# EAGLE board V2d (EAGLE 6.5.0)
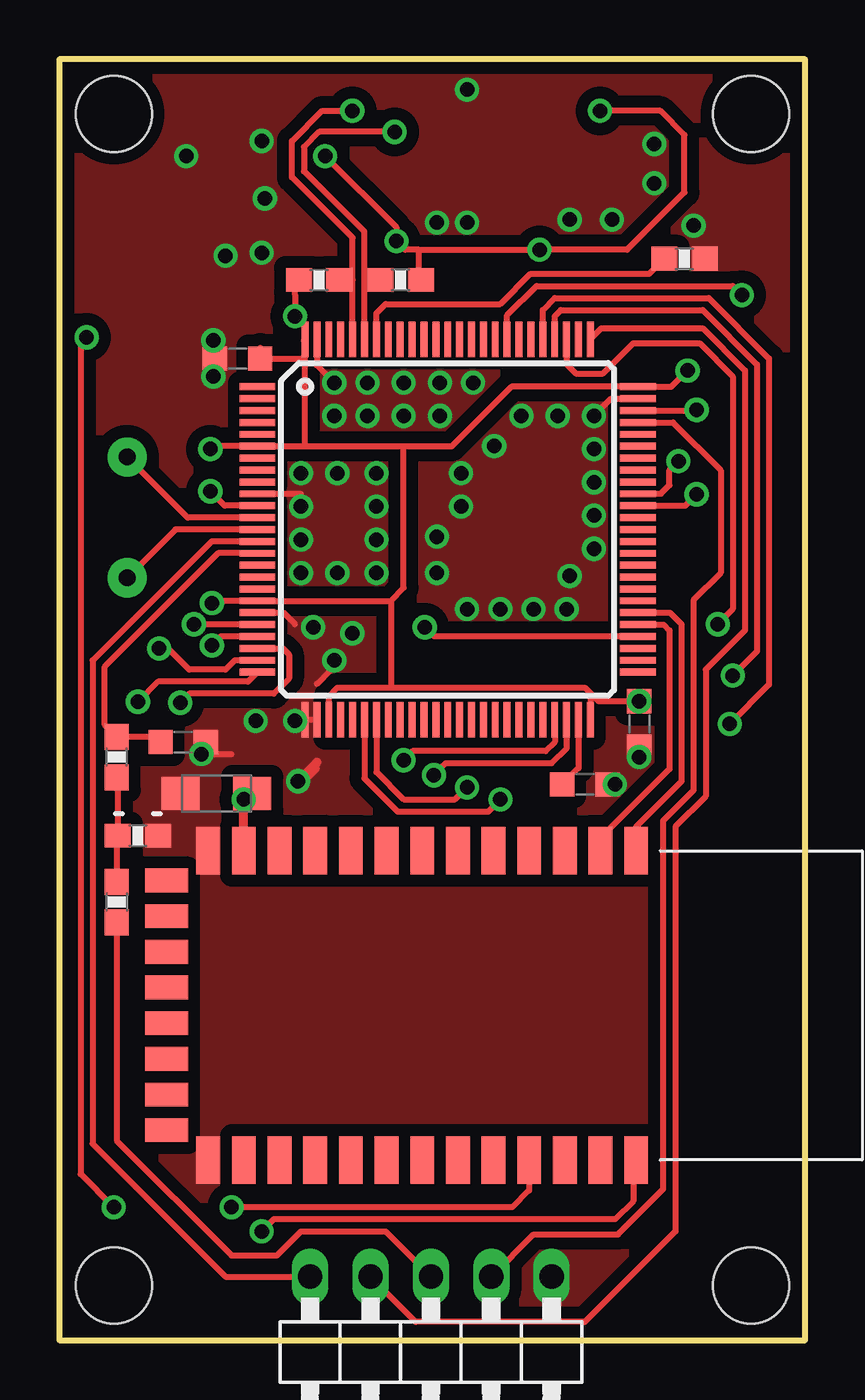
[diagram p0: board, top side]
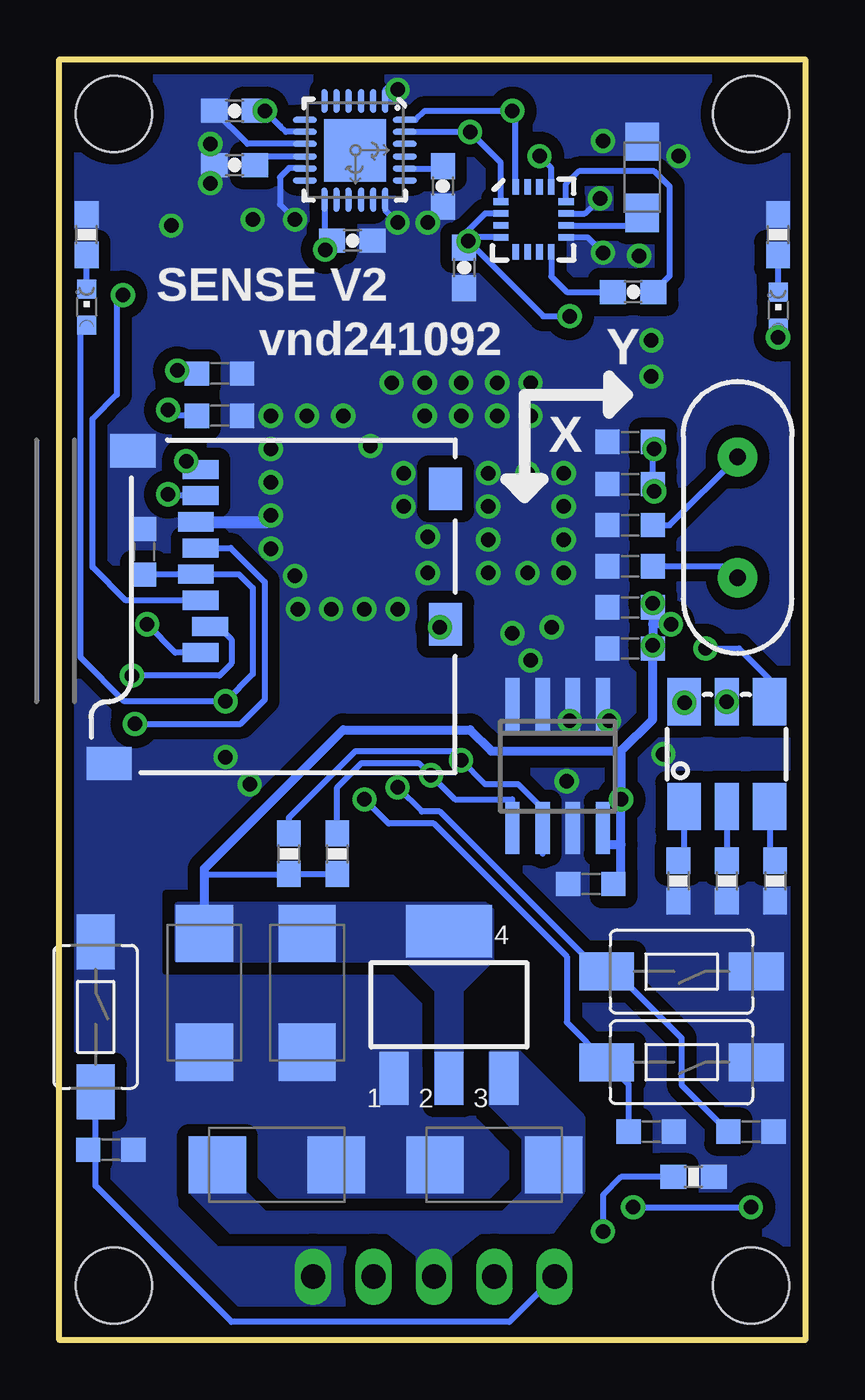
[diagram p1: board, bottom side, seen from below]

Size 31.37 x 53.85 mm. Coordinates in mm from the lower left corner, seen from the top.
Outline: 0,0 31.37,0 31.37,53.85 0,53.85 0,0
Copper layers (1*16): Top 0.035mm / dielectric 1.5mm / Bottom 0.035mm
Design rules "default *": minimum track width 10mil, minimum drill 24mil, track to track 8mil, track to pad 8mil, pad to pad 8mil, via to via 10mil, smd to smd 8mil, copper to edge 20mil, drill to drill 10mil, minimum pad ring 10mil, minimum via ring 8mil, stop-mask expansion 0mil, vias tented up to drill 100mil, thermal gap 10mil
Net classes: 1 power: width 0.15 mm, drill 0.2 mm, clearance 0.152 mm
Holes 3.2 mm at 2.29,2.29 29.08,2.29 29.08,51.56 2.29,51.56
tKeepout: area 120.2,-2.6 to 127.2,4.4; area 15.2,-6.4 to 22.2,0.6; area 93.4,-2.6 to 100.4,4.4; area 93.4,46.5 to 100.4,53.5; area 120.2,46.5 to 127.2,53.5

## Footprints (pad centres in the part's own frame; a part is rotated, then mirrored left to right if it is on the bottom)
C-0603 = smd 1.016 x 1.016: 1 -0.953,0; 2 0.953,0
SMC_C = smd 2.4 x 2.4: + -2.5,0; - 2.5,0
SMC_A = smd 1.6 x 1.4: + -1.5,0; - 1.5,0
SPARKFUN_0603-CAP = smd 1.1 x 1: 1 -0.85,0; 2 0.85,0
SO-08 = smd 0.6 x 2.2: 1 -1.905,-2.6; 2 -0.635,-2.6; 3 0.635,-2.6; 4 1.905,-2.6; 5 1.905,2.6; 6 0.635,2.6; 7 -0.635,2.6; 8 -1.905,2.6
LINEAR_SOT223 = smd 1.219 x 2.235: 1 -2.311,-3.099; 2 0,-3.099; 3 2.311,-3.099 | smd 3.6 x 2.2: 4 0,3.099
TESTING_QFN-24-4MM2 = smd 1.016 x 0.254: 1 -2.066,1.257; 2 -2.066,0.75; 3 -2.066,0.247; 4 -2.066,-0.287; 5 -2.066,-0.792; 6 -2.066,-1.297; 13 2.086,-1.297; 14 2.086,-0.792; 15 2.086,-0.287; 16 2.086,0.247; 17 2.086,0.75; 18 2.086,1.257 | smd 0.254 x 1.016: 7 -1.267,-2.122; 8 -0.762,-2.122; 9 -0.258,-2.122; 10 0.278,-2.122; 11 0.78,-2.122; 12 1.287,-2.122; 19 1.287,2.082; 20 0.78,2.082; 21 0.278,2.082; 22 -0.258,2.082; 23 -0.762,2.082; 24 -1.267,2.082 | smd 2.616 x 2.616: P$1 0.02,-0.01
SPARKFUN_16LPCC = smd 0.65 x 0.28: 1 -1.37,0.75; 2 -1.37,0.25; 3 -1.37,-0.25; 4 -1.37,-0.75; 9 1.37,-0.75; 10 1.37,-0.25; 11 1.37,0.25; 12 1.37,0.75 | smd 0.28 x 0.65: 5 -0.75,-1.37; 6 -0.25,-1.37; 7 0.25,-1.37; 8 0.75,-1.37; 13 0.75,1.37; 14 0.25,1.37; 15 -0.25,1.37; 16 -0.75,1.37
1X05/90 = drill 1.016 long: 1 -5.08,-3.81; 2 -2.54,-3.81; 3 0,-3.81; 4 2.54,-3.81; 5 5.08,-3.81
CHIPLED_0603 = smd 0.8 x 0.8: A 0,-0.75; C 0,0.75
SPARKFUN_0603-RES = smd 1.1 x 1: 1 -0.85,0; 2 0.85,0
TACTILE-SWITCH-1101NE = smd 2.3 x 1.6: P$1 -3.15,0; P$2 3.15,0
MICRO-SD-SOCKET-PP = smd 0.8 x 1.5: 1 -8.94,10.7; 2 -7.84,10.3; 3 -6.74,10.7; 4 -5.64,10.9; 5 -4.54,10.7; 6 -3.44,10.9; 7 -2.34,10.7; 8 -1.24,10.7 | smd 1.8 x 1.4: CD1 -2.05,0.4; CD2 -7.75,0.4 | smd 1.4 x 1.9: GND1 -13.6,14.55; GND3 -0.45,13.55
TQFP100 = smd 1.5 x 0.29: 1 -8,6; 2 -8,5.5; 3 -8,5; 4 -8,4.5; 5 -8,4; 6 -8,3.5; 7 -8,3; 8 -8,2.5; 9 -8,2; 10 -8,1.5; 11 -8,1; 12 -8,0.5; 13 -8,0; 14 -8,-0.5; 15 -8,-1; 16 -8,-1.5; 17 -8,-2; 18 -8,-2.5; 19 -8,-3; 20 -8,-3.5; 21 -8,-4; 22 -8,-4.5; 23 -8,-5; 24 -8,-5.5; 25 -8,-6; 51 8,-6; 52 8,-5.5; 53 8,-5; 54 8,-4.5; 55 8,-4; 56 8,-3.5; 57 8,-3; 58 8,-2.5; 59 8,-2; 60 8,-1.5; 61 8,-1; 62 8,-0.5; 63 8,0; 64 8,0.5; 65 8,1; 66 8,1.5; 67 8,2; 68 8,2.5; 69 8,3; 70 8,3.5; 71 8,4; 72 8,4.5; 73 8,5; 74 8,5.5; 75 8,6 | smd 0.29 x 1.5: 26 -6,-8; 27 -5.5,-8; 28 -5,-8; 29 -4.5,-8; 30 -4,-8; 31 -3.5,-8; 32 -3,-8; 33 -2.5,-8; 34 -2,-8; 35 -1.5,-8; 36 -1,-8; 37 -0.5,-8; 38 0,-8; 39 0.5,-8; 40 1,-8; 41 1.5,-8; 42 2,-8; 43 2.5,-8; 44 3,-8; 45 3.5,-8; 46 4,-8; 47 4.5,-8; 48 5,-8; 49 5.5,-8; 50 6,-8; 76 6,8; 77 5.5,8; 78 5,8; 79 4.5,8; 80 4,8; 81 3.5,8; 82 3,8; 83 2.5,8; 84 2,8; 85 1.5,8; 86 1,8; 87 0.5,8; 88 0,8; 89 -0.5,8; 90 -1,8; 91 -1.5,8; 92 -2,8; 93 -2.5,8; 94 -3,8; 95 -3.5,8; 96 -4,8; 97 -4.5,8; 98 -5,8; 99 -5.5,8; 100 -6,8
BLUETOOTH_SMD = smd 2 x 1: 1 0,0; 2 0,-1.5; 3 0,-3; 4 0,-4.5; 5 0,-6; 6 0,-7.5; 7 0,-9; 8 0,-10.5; 9 0,-12; 10 0,-13.5; 11 0,-15; 12 0,-16.5; 13 0,-18; 22 13,-18; 23 13,-16.5; 24 13,-15; 25 13,-13.5; 26 13,-12; 27 13,-10.5; 28 13,-9; 29 13,-7.5; 30 13,-6; 31 13,-4.5; 32 13,-3; 33 13,-1.5; 34 13,0 | smd 1 x 1.8: 14 1.25,-19.75; 15 2.75,-19.75; 16 4.25,-19.75; 17 5.75,-19.75; 18 7.25,-19.75; 19 8.75,-19.75; 20 10.25,-19.75; 21 11.75,-19.75
SMD = smd 1.99 x 1.4: B+ -2.2,-1.8; B- 2.2,-1.8; R+ -2.2,1.8; R- 2.2,1.8 | smd 1.99 x 1: G+ -2.2,0; G- 2.2,0
HC49US = drill 0.7 pad 1.651: 1 -2.54,0; 2 2.54,0

## Placement (x,y rotation side)
C1  [C-0603]  7.37,34.26 180 bottom
C2  [C-0603]  27.81,33.15 270 bottom
C3  6v 10u  [SMC_C]  20.96,14.61 270 bottom
C4  6v 10u  [SMC_A]  6.6,22.99 180 top
C5  16v47u  [SMC_C]  13.08,7.37 180 bottom
C6  [C-0603]  7.37,29.08 180 bottom
C7  [C-0603]  6.48,8.76 0 bottom
C8  [C-0603]  7.37,30.81 180 bottom
C9  [C-0603]  7.37,35.99 180 bottom
C10  [C-0603]  7.37,37.77 180 bottom
C11  [C-0603]  9.02,19.18 0 bottom
C12  [C-0603]  7.49,41.27 180 top
C13  [C-0603]  29.21,8 0 bottom
C15  [C-0603]  22.1,23.37 0 top
C16  16v47u  [SMC_C]  22.23,7.37 0 bottom
C17  [C-0603]  24.64,38.86 0 bottom
C18  [C-0603]  24.38,25.91 270 top
C19  [C-0603]  24.64,40.64 0 bottom
C20  [C-0603]  7.37,32.54 180 bottom
C21  [C-0603]  5.21,25.15 180 top
C23  6v 10u  [SMC_C]  25.27,14.61 270 bottom
C25  [C-0603]  2.29,8.76 0 bottom
C26  100n  [SPARKFUN_0603-CAP]  24,49.4 180 bottom
C27  100n  [SPARKFUN_0603-CAP]  7.24,44.07 0 bottom
C28  4.7u  [SMC_A]  6.86,48.9 90 bottom
C29  100n  [SPARKFUN_0603-CAP]  14.35,45.09 270 bottom
C36  2.2n  [SPARKFUN_0603-CAP]  15.24,48.51 270 bottom
C38  100n  [SPARKFUN_0603-CAP]  19.05,46.23 0 bottom
C39  100n  [SPARKFUN_0603-CAP]  24,51.69 180 bottom
IC2  24LC256SN  [SO-08]  10.41,24.13 180 bottom
IC3  LINEAR_MC33269ST-3.3T3  [LINEAR_SOT223]  14.99,14.1 0 bottom
IC4  MPU-6050  [TESTING_QFN-24-4MM2]  18.92,50.04 270 bottom
IC5  HMC5883L  [SPARKFUN_16LPCC]  11.43,47.12 0 bottom
JP4  [1X05/90]  15.62,-1.14 180 top
LD1  [CHIPLED_0603]  1.14,43.31 0 bottom
LD2  [CHIPLED_0603]  30.23,43.43 0 bottom
R1  10K  [SPARKFUN_0603-RES]  30.23,46.48 90 bottom
R2  10K  [SPARKFUN_0603-RES]  1.27,19.3 270 bottom
R3  10K  [SPARKFUN_0603-RES]  3.3,19.3 270 bottom
R5  10K  [SPARKFUN_0603-RES]  4.7,6.86 0 bottom
R6  10K  [SPARKFUN_0603-RES]  5.33,19.3 270 bottom
R7  10k  [SPARKFUN_0603-RES]  26.29,45.47 180 top
R9  10K  [SPARKFUN_0603-RES]  1.14,46.48 90 bottom
R10  [SPARKFUN_0603-RES]  14.35,44.58 0 top
R11  [SPARKFUN_0603-RES]  10.92,44.58 180 top
R15  4K7  [SPARKFUN_0603-RES]  21.72,20.45 90 bottom
R16  4K7  [SPARKFUN_0603-RES]  19.69,20.45 270 bottom
R23  10K  [SPARKFUN_0603-RES]  2.41,24.51 90 top
R24  10K  [SPARKFUN_0603-RES]  2.41,18.41 270 top
R25  10K  [SPARKFUN_0603-RES]  3.3,21.21 180 top
S1  RESET  [TACTILE-SWITCH-1101NE]  29.85,13.59 270 bottom
S2  RESET  [TACTILE-SWITCH-1101NE]  5.21,15.49 180 bottom
S4  RESET  [TACTILE-SWITCH-1101NE]  5.21,11.68 180 bottom
SDCARD2  microSD Socket  [MICRO-SD-SOCKET-PP]  14.73,37.85 90 bottom
STM  STM32F4X7VX  [TQFP100]  16.33,34.08 0 top
U1  HC_05  [BLUETOOTH_SMD]  24.26,20.57 270 top
U$12  RGB_LED  [SMD]  3.3,24.64 90 bottom
Y1  [HC49US]  2.85,34.59 90 bottom

## Library data of the parts
C1 C2 C6-C13 C15 C17-C21 C25 = cap-pan40
C3-C5 C16 C23 C28 = rcl
C26 C27 C29 C36 C38 C39 R10 R11 = Helios_RLC
IC2 = microchip; DIGIKEY: 24LC256-E/SN-ND; MF: MICROCHIP; MPN: 24LC256-I/SN; OC_FARNELL: 9757996; OC_NEWARK: 27C9144
IC3 = Robotech_Other
IC4 IC5 = Helios_IMU
JP4 = pinhead-1
LD1 LD2 = led
R1-R3 R5-R7 R9 R15 R16 R23-R25 = Robotech_RCL
S1 S2 S4 = pixhawk2; PARTNO: EVQ-P7J01P
SDCARD2 = SparkFun
STM = pixhawk2; PARTNO: STM32F427VI
U1 = SerialPortBluetooth
U$12 = RGB_LED
Y1 = SparkFun-FreqCtrl

## Nets
3.3V: C2.2 C3.+ C4.+ C6.1 C8.1 C9.1 C10.1 C11.2 C12.1 C18.1 C19.1 C23.+ C29.1 C38.1 C39.1 IC2.8 IC3.2 IC3.4 IC4.8 IC4.13 IC5.2 IC5.4 IC5.13 LD2.A R10.2 R11.2 R15.1 R16.2 SDCARD2.4 STM.6 STM.11 STM.19 STM.21 STM.22 STM.28 STM.50 STM.75 STM.100 U1.12
+5V: C5.+ C16.+ IC3.3 JP4.3 R24.2
ADC12_IN1: C21.2 R23.2 STM.15
ADC12_IN8: STM.35
BOOT0: R7.2 STM.94
BOOT1: STM.37
BT_KEY: R5.1 U1.34
BUTTONA: C7.1 S4.P$2 STM.31
BUTTONB: C25.1 S2.P$2 STM.32
GND: C1.2 C2.1 C3.- C4.- C5.- C6.2 C7.2 C8.2 C9.2 C10.2 C11.1 C12.2 C13.2 C15.2 C16.- C17.2 C18.2 C19.2 C20.2 C21.1 C23.- C25.2 C26.2 C28.- C29.2 C36.2 C38.2 C39.2 IC2.1 IC2.2 IC2.3 IC2.4 IC2.7 IC3.1 IC4.1 IC4.9 IC4.11 IC4.18 IC5.9 IC5.11 JP4.1 R1.2 R2.2 R3.2 R5.2 R6.2 R7.1 R9.2 R25.1 S1.P$1 S2.P$1 S4.P$1 SDCARD2.6 SDCARD2.GND1 SDCARD2.GND3 STM.10 STM.20 STM.26 STM.27 STM.74 STM.99 U1.13 U1.22
I2C1_SCL: IC4.23 IC5.1 R10.1 STM.95
I2C1_SDA: IC4.24 IC5.16 R11.1 STM.96
I2C2_SCL: IC2.6 R15.2 STM.47
I2C2_SDA: IC2.5 R16.1 STM.48
JTDI: STM.77
N$1: C1.1 STM.12 Y1.2
N$2: R2.1 U$12.B+
N$3: C26.1 IC4.10
N$4: LD1.A U1.31
N$5: LD1.C R9.1
N$6: R6.1 U$12.R+
N$7: R3.1 U$12.G+
N$8: C36.1 IC4.20
N$10: C27.1 IC5.8
N$11: LD2.C R1.1
N$12: C28.+ IC5.10
N$13: C27.2 IC5.12
N$27: R23.1 R24.1 R25.2
N$29: C20.1 STM.13 Y1.1
N$31: C17.1 STM.73
N$32: C15.1 STM.49
PWM_8: STM.63
PWM_9: STM.5
PWM_10: STM.64
PWM_11: STM.4
RGB_CH1: STM.23 U$12.R-
RGB_CH2: STM.24 U$12.B-
RGB_CH3: STM.25 U$12.G-
SDIO_CLK: SDCARD2.5 STM.80
SDIO_CMD: SDCARD2.3 STM.83
SDIO_D0: SDCARD2.7 STM.65
SDIO_D1: SDCARD2.8 STM.66
SDIO_D2: SDCARD2.1 STM.78
SDIO_D3: SDCARD2.2 STM.79
SDIO_DETECT: SDCARD2.CD2 STM.54
SW-!RESET: C13.1 JP4.5 S1.P$2 STM.14
SW_CLK: JP4.4 STM.76
SW_DIO: JP4.2 STM.72
USART1_RX: STM.93
USART1_TX: STM.92
USART3_RX: STM.56 U1.1
USART3_TX: STM.55 U1.2

## Tracks (layer width: path | path; a pad name or v marks a point on that pad's centre or on a via)
3.3V  (via drill 0.61)
  Top 0.254: STM.100 10.28,42.04 | 10.33,37.58 10.33,41.4 | 10.33,41.4 STM.100 | 10.33,37.58 STM.6 6.47,37.58 v6.35,37.47 | 10.33,41.4 10.2,41.27 C12.1 8.44,41.72 | 8.31,30.1 STM.21 5.67,30.08 v5.65,30.1 | 10.2,44.45 9.78,44.45 9.91,44.32 9.91,43.97 | 15.11,45.85 15.11,44.66 R10.2 15.24,44.62 | STM.28 11.33,27.08 11.68,27.43 13.94,27.43 | 13.94,27.43 22.1,27.43 22.33,27.2 | 22.33,27.2 STM.50 | R11.2 10.2,44.45 | 10.2,44.45 10.33,44.45 | 9.91,43.97 | 9.91,43.97 | STM.11 6.95,35.08 v6.35,35.69 | 10.33,37.58 14.48,37.58 | 14.48,37.58 16.5,37.58 19,40.08 STM.75 25.73,40.08 v26.42,40.77 | C18.1 22.67,26.86 22.33,27.2 | 15.11,45.85 v20.19,45.85 23.88,45.85 26.29,48.26 26.29,50.67 25.27,51.69 v22.73,51.69 | 14.46,45.92 v14.17,46.21 | 9.91,43.97 v9.91,43.05 10.33,42.63 STM.100 | STM.22 6.79,29.58 v6.41,29.21 | v6.41,30.99 6.51,31.08 STM.19 13.94,31.08 | v11.18,49.78 14.17,46.79 v14.17,46.21 | 15.11,45.85 14.54,45.85 v14.17,46.21 | 14.48,37.58 14.48,31.62 13.94,31.08 | 13.94,31.08 13.94,27.43 | C4.+ 8,22.99 v7.75,22.73
  Top 0.381: U1.12 v7.75,22.73
  Bottom 0.254: IC5.13 10.68,49.29 v11.18,49.78 | C39.1 v22.73,51.69 22.09,51.04 | IC4.8 21.84,50.8 22.09,51.04 | 22.09,51.04 | IC5.2 13.47,47.37 14.35,46.48 C29.1 14.35,46.03 v14.17,46.21 | v20.19,45.85 20.19,45.97 | 22.09,51.04 | 22.09,51.04 | v6.35,35.69 6.35,35.93 C9.1 6.41,37.4 v6.35,37.47 6.35,37.71 C10.1 | v6.41,30.99 C8.1 | C2.2 27.8,32.21 SDCARD2.4 23.82,32.21 23.24,31.62 23.24,28 C18.1 28.64,26.86 30.48,28.7 30.48,42.43 LD2.A | R16.2 R15.1 21.76,19.56 25.27,19.56 | IC4.13 20.22,45.87 v20.19,45.85 | C38.1 19.9,46.14 v20.19,45.85 | v14.17,46.21 11.01,43.05 v9.91,43.05 | IC5.4 14.02,46.37 v14.17,46.21 | C19.1 26.29,40.64 v26.42,40.77
  Bottom 0.381: 7.75,24.77 13.21,24.77 14.1,25.65 19.43,25.65 25.27,19.81 25.27,19.56 C23.+ | 7.75,24.77 v7.75,22.73 7.75,20.83 | C11.2 7.75,19.18 7.75,20.83 | 7.75,20.83 8.51,20.83 IC2.8 | C8.1 6.41,30.1 | v5.65,30.1 6.41,30.1 | 6.41,30.1 v6.41,29.21 C6.1 6.41,26.1 7.75,24.77
  other vias: 24.38,26.86
  pour Bottom (isolate 0.635, no thermals): 26.42,16 16.76,16 15.49,14.73 15.49,12.06 14.48,12.06 14.48,14.73 13.21,16 13.21,18.29 26.42,18.29
+5V
  Top 0.254: R24.2 2.41,8.38 7.24,3.56 9.14,3.56 10.16,4.57 13.72,4.57 JP4.3
  pour Bottom (isolate 0.635, no thermals): 16.26,2.67 16.26,3.56 17.53,4.57 24.13,4.57 25.78,6.22 23.62,6.22 22.73,5.33 12.7,5.33 11.81,6.22 11.81,8.51 13.21,9.91 13.21,12.06 12.06,12.06 9.4,9.4 9.4,6.22 10.67,4.57 13.72,4.57 14.99,3.56 14.99,2.67
ADC12_IN1
  Top 0.254: C21.2 arc90 4.04,25.36 R23.2 1.91,25.87 1.91,28.32 6.67,33.08 STM.15
BOOT0
  Top 0.254: STM.94 13.33,43.17 13.72,43.56 18.54,43.56 19.81,44.83 24.8,44.83 R7.2
BT_KEY  (via drill 0.61)
  Top 0.254: U1.34 24.13,7.45 24.13,5.84 23.37,5.08 9.02,5.08 v8.51,4.57
  Bottom 0.254: R5.1 7.75,6.86 8.51,6.1 v8.51,4.57
BUTTONA  (via drill 0.61)
  Top 0.254: STM.31 12.83,23.62 14.22,22.23 18.03,22.23 v18.54,22.73
  Bottom 0.254: v18.54,22.73 17.53,21.72 15.62,21.72 10.03,16.13 10.03,13.36 S4.P$2 | 8.76,11.68 S4.P$2 | S4.P$2 7.43,10.76 C7.1
BUTTONB  (via drill 0.61)
  Top 0.254: STM.32 13.33,23.88 14.48,22.73 16.64,22.73 v17.14,23.24
  Bottom 0.254: v17.14,23.24 16.13,22.23 15.37,22.23 8.64,15.49 S2.P$2 8,15.49 5.21,12.7 5.21,10.73 C25.1
GND  (via drill 0.61)
  Top 0.254: 10.83,27.59 11.43,28.19 11.43,28.45 v11.56,28.57 | v5.97,24.64 7.24,24.64 | 10.83,24.04 10.29,23.5 | v22.48,38.86 23.2,39.58 STM.74 | STM.10 10.16,35.58 | STM.26 STM.27 | STM.20 9.42,30.58 9.91,30.1 | STM.99 10.83,40.99 v11.56,40.26
  Top 0.381: 10.83,24.29 v10.03,23.5
  Bottom 0.254: 24.77,51.6 C39.2 23.46,50.3 IC4.9 | 17.24,52.1 IC4.1 17.67,52.56 17.27,52.96 | IC4.11 21.06,49.26 21.08,49.28 21.72,49.28 22.1,48.9 22.1,47.75 v21.46,47.12 | IC5.11 9.27,47.37 v8.64,48.01 | IC4.18 17.67,47.51 v17.14,46.99 | IC5.9 9.16,46.37 v8.51,45.72
  Bottom 0.508: SDCARD2.6 22.62,34.41
  other vias: 10.16,36.45 10.67,29.97 14.48,38.86 11.56,38.86 12.95,38.86 14.48,40.26 12.95,40.26 6.48,42.04 8.51,50.42 25.02,50.29 20.96,38.86 19.43,38.86 5.33,49.78 17.14,52.58 25.02,48.64 11.68,36.45 17.4,40.26 22.48,37.47 22.48,34.67 22.48,36.07 21.34,30.73 19.94,30.73 15.87,32.26 15.87,33.78 6.48,40.51 6.99,45.59 15.87,46.99 12.32,29.72 24.38,24.51 26.67,46.86 8.25,26.04 9.91,26.04 23.37,23.37 16,38.86 16,40.26 11.68,32.26 10.16,35.05 10.16,33.66 10.16,32.26 13.33,35.05 13.33,32.26 13.33,33.66 13.33,36.45 22.48,33.27 23.24,47.12 18.54,30.73 17.14,30.73 16.89,36.45 16.89,35.05 18.29,37.59 21.46,32.13
  pour Top (isolate 0.508, rank 6, no thermals): 31.62,-0.25 31.62,54.23 -8.76,54.23 -8.76,-0.25
  pour Bottom (isolate 0.508, rank 6, no thermals): -1.65,53.98 44.2,53.98 44.2,-1.27 33.65,-1.27 33.65,-1.27 -1.65,-1.27
I2C1_SCL  (via drill 0.61)
  Top 0.254: STM.95 12.83,44.58 | 12.83,44.58 12.83,46.61 10.29,49.15 10.29,50.16 10.92,50.8 v14.1,50.8 | R10.1 12.83,44.58
  Bottom 0.254: IC4.23 | IC4.23 v14.1,50.8 | v14.1,50.8 | IC5.1 12.8,49.5 v14.1,50.8
I2C1_SDA  (via drill 0.61)
  Top 0.254: STM.96 12.33,44.58 | 12.33,44.58 12.33,46.34 9.78,48.9 9.78,50.42 11.05,51.69 v12.32,51.69 | R11.1 12.33,44.58
  Bottom 0.254: IC4.24 16.38,51.31 16,51.69 v12.32,51.69 12.18,51.55 IC5.16
I2C2_SCL  (via drill 0.61)
  Top 0.254: STM.47 20.83,25.15 20.45,24.77 14.86,24.77 v14.48,24.38
  Bottom 0.254: 11.05,20.45 IC2.6 11.05,22.35 12.06,23.37 13.46,23.37 v14.48,24.38 14.86,24.77 18.92,24.77 21.72,21.97 R15.2
I2C2_SDA  (via drill 0.61)
  Top 0.254: STM.48 21.33,24.89 20.7,24.26 16.26,24.26 v15.75,23.75
  Bottom 0.254: IC2.5 12.32,22.73 14.73,22.73 v15.75,23.75 16.26,24.26 18.67,24.26 19.69,23.24 R16.1
N$1
  Top 0.254: STM.12 5.4,34.58 Y1.2
  Bottom 0.254: C1.1 5.71,34.27 Y1.2
N$2
  Bottom 0.254: U$12.B+ 1.5,20.39 R2.1
N$3
  Bottom 0.254: IC4.10 22.8,49.76 C26.1
N$4  (via drill 0.61)
  Top 0.254: v1.14,42.16 0.89,41.91 0.89,6.99 v2.29,5.59 | v7.24,5.59 19.05,5.59 19.76,6.29 U1.31
  Bottom 0.254: v7.24,5.59 v2.29,5.59 | v1.14,42.16 LD1.A
N$5
  Bottom 0.254: LD1.C R9.1
N$6
  Bottom 0.254: U$12.R+ 5.1,20.39 R6.1
N$7
  Bottom 0.254: U$12.G+ R3.1
N$8
  Bottom 0.254: IC4.20 15.35,49.26 C36.1
N$10
  Bottom 0.254: IC5.8 10.68,44.72 10.03,44.07 C27.1
N$11
  Bottom 0.254: LD2.C R1.1
N$12
  Bottom 0.254: IC5.10 7.39,46.87 C28.+
N$13
  Bottom 0.254: IC5.12 10.06,48.61 9.52,49.15 6.35,49.15 5.71,48.51 5.71,44.74 C27.2
N$27
  Top 0.254: R23.1 2.45,23.62 R25.2 2.45,21.08 2.41,21.04 R24.1
N$29
  Top 0.254: STM.13 4.88,34.08 Y1.1
  Bottom 0.254: C20.1 3.33,32.54 Y1.1
N$31  (via drill 0.61)
  Top 0.254: STM.73 26.77,39.08 v26.8,39.12
  Bottom 0.254: C17.1 26.54,38.86 v26.8,39.12
N$32
  Top 0.254: STM.49 21.83,24.05 C15.1
RGB_CH1  (via drill 0.61)
  Top 0.254: STM.23 9.4,29.08 9.65,28.83 9.65,27.81 9.02,27.18 5.46,27.18 v5.08,26.8
  Bottom 0.254: U$12.R- 5.1,26.82 v5.08,26.8
RGB_CH2  (via drill 0.61)
  Top 0.254: STM.24 7.38,28.58 6.99,28.19 5.46,28.19 4.57,29.08 v4.19,29.08
  Bottom 0.254: v4.19,29.08 2.79,29.08 1.52,27.81 1.52,26.86 U$12.B-
RGB_CH3  (via drill 0.61)
  Top 0.254: STM.25 7.93,27.69 4.15,27.69 U$12.G-
  other vias: 3.3,26.84
SDIO_CLK  (via drill 0.61)
  Top 0.254: STM.80 20.33,43.32 20.83,43.81 27.3,43.81 29.85,41.27 29.85,27.56 v28.19,25.91
  Bottom 0.254: SDCARD2.5 24.16,33.31 22.73,31.88 22.73,26.92 23.75,25.91 v28.19,25.91
SDIO_CMD  (via drill 0.61)
  Top 0.254: STM.83 18.83,43.09 20.07,44.32 28.32,44.32 v28.7,43.94
  Bottom 0.254: SDCARD2.3 28.58,31.11 29.97,32.5 29.97,38.73 28.96,39.75 28.96,43.69 v28.7,43.94
SDIO_D0  (via drill 0.61)
  Top 0.254: STM.65 26.32,35.08 v26.8,35.56
  Bottom 0.254: SDCARD2.7 26.74,35.51 v26.8,35.56
SDIO_D1  (via drill 0.61)
  Top 0.254: STM.66 25.3,35.58 25.65,35.94 25.65,36.58 v26.04,36.96
  Bottom 0.254: SDCARD2.8 25.68,36.61 v26.04,36.96
SDIO_D2  (via drill 0.61)
  Top 0.254: STM.78 21.33,41.03 21.72,40.64 22.86,40.64 24.13,41.91 26.92,41.91 28.32,40.51 28.32,30.73 v27.69,30.1
  Bottom 0.254: SDCARD2.1 26.49,28.91 v27.69,30.1
SDIO_D3  (via drill 0.61)
  Top 0.254: STM.79 20.83,43.05 21.08,43.31 27.05,43.31 29.34,41.02 29.34,28.96 v28.32,27.94
  Bottom 0.254: SDCARD2.2 24.67,30.01 24.13,29.46 24.13,28.45 24.64,27.94 v28.32,27.94
SDIO_DETECT  (via drill 0.61)
  Top 0.254: STM.54 15.75,29.58 v15.37,29.97
  Bottom 0.254: v15.37,29.97 15.24,30.1 SDCARD2.CD2
SW-!RESET
  Top 0.254: STM.14 6.41,33.58 1.4,28.57 1.4,8.26 6.99,2.67 JP4.5
  Bottom 0.254: 29.85,8.32 29.85,6.48 24.13,0.76 12.45,0.76 JP4.5 | 29.85,8.32 S1.P$2 | 29.85,8.32 C13.1
SW_CLK
  Top 0.254: STM.76 22.79,42.55 27.05,42.55 28.83,40.77 28.83,29.84 27.18,28.19 27.18,22.86 25.91,21.59 25.91,4.57 22.1,0.76 14.99,0.76 JP4.4
SW_DIO
  Top 0.254: STM.72 25.8,38.58 27.81,36.58 27.81,32.26 26.67,31.11 26.67,23.11 25.4,21.84 25.4,6.35 23.5,4.45 19.94,4.45 JP4.2
USART3_RX
  Top 0.254: STM.56 25.68,30.58 26.16,30.1 26.16,23.5 24.26,21.59 U1.1
USART3_TX
  Top 0.254: STM.55 25.42,30.08 25.65,29.84 25.65,24 22.76,21.11 U1.2

## Text on the board
bNames: SENSE V2 | Y | vnd241092 | X